# Altium PCB 388D_Control_v1_PCB1_harry.PcbDoc (part 4 of 5)
Units mil, origin at the board's own origin, x right, y up, seen from the top; angles counter-clockwise.
Board outline 4800 x 4000 mil, 6 copper layers (Top Layer, Singal Layer 2, Signal layer 3, Signal Layer 4, Signal Layer 5, Bottom Layer), stack 32.7 mil thick; 431 components, 469 nets, 2000 pads, 719 vias.
Unrouted connection lines stored in the file: 971.
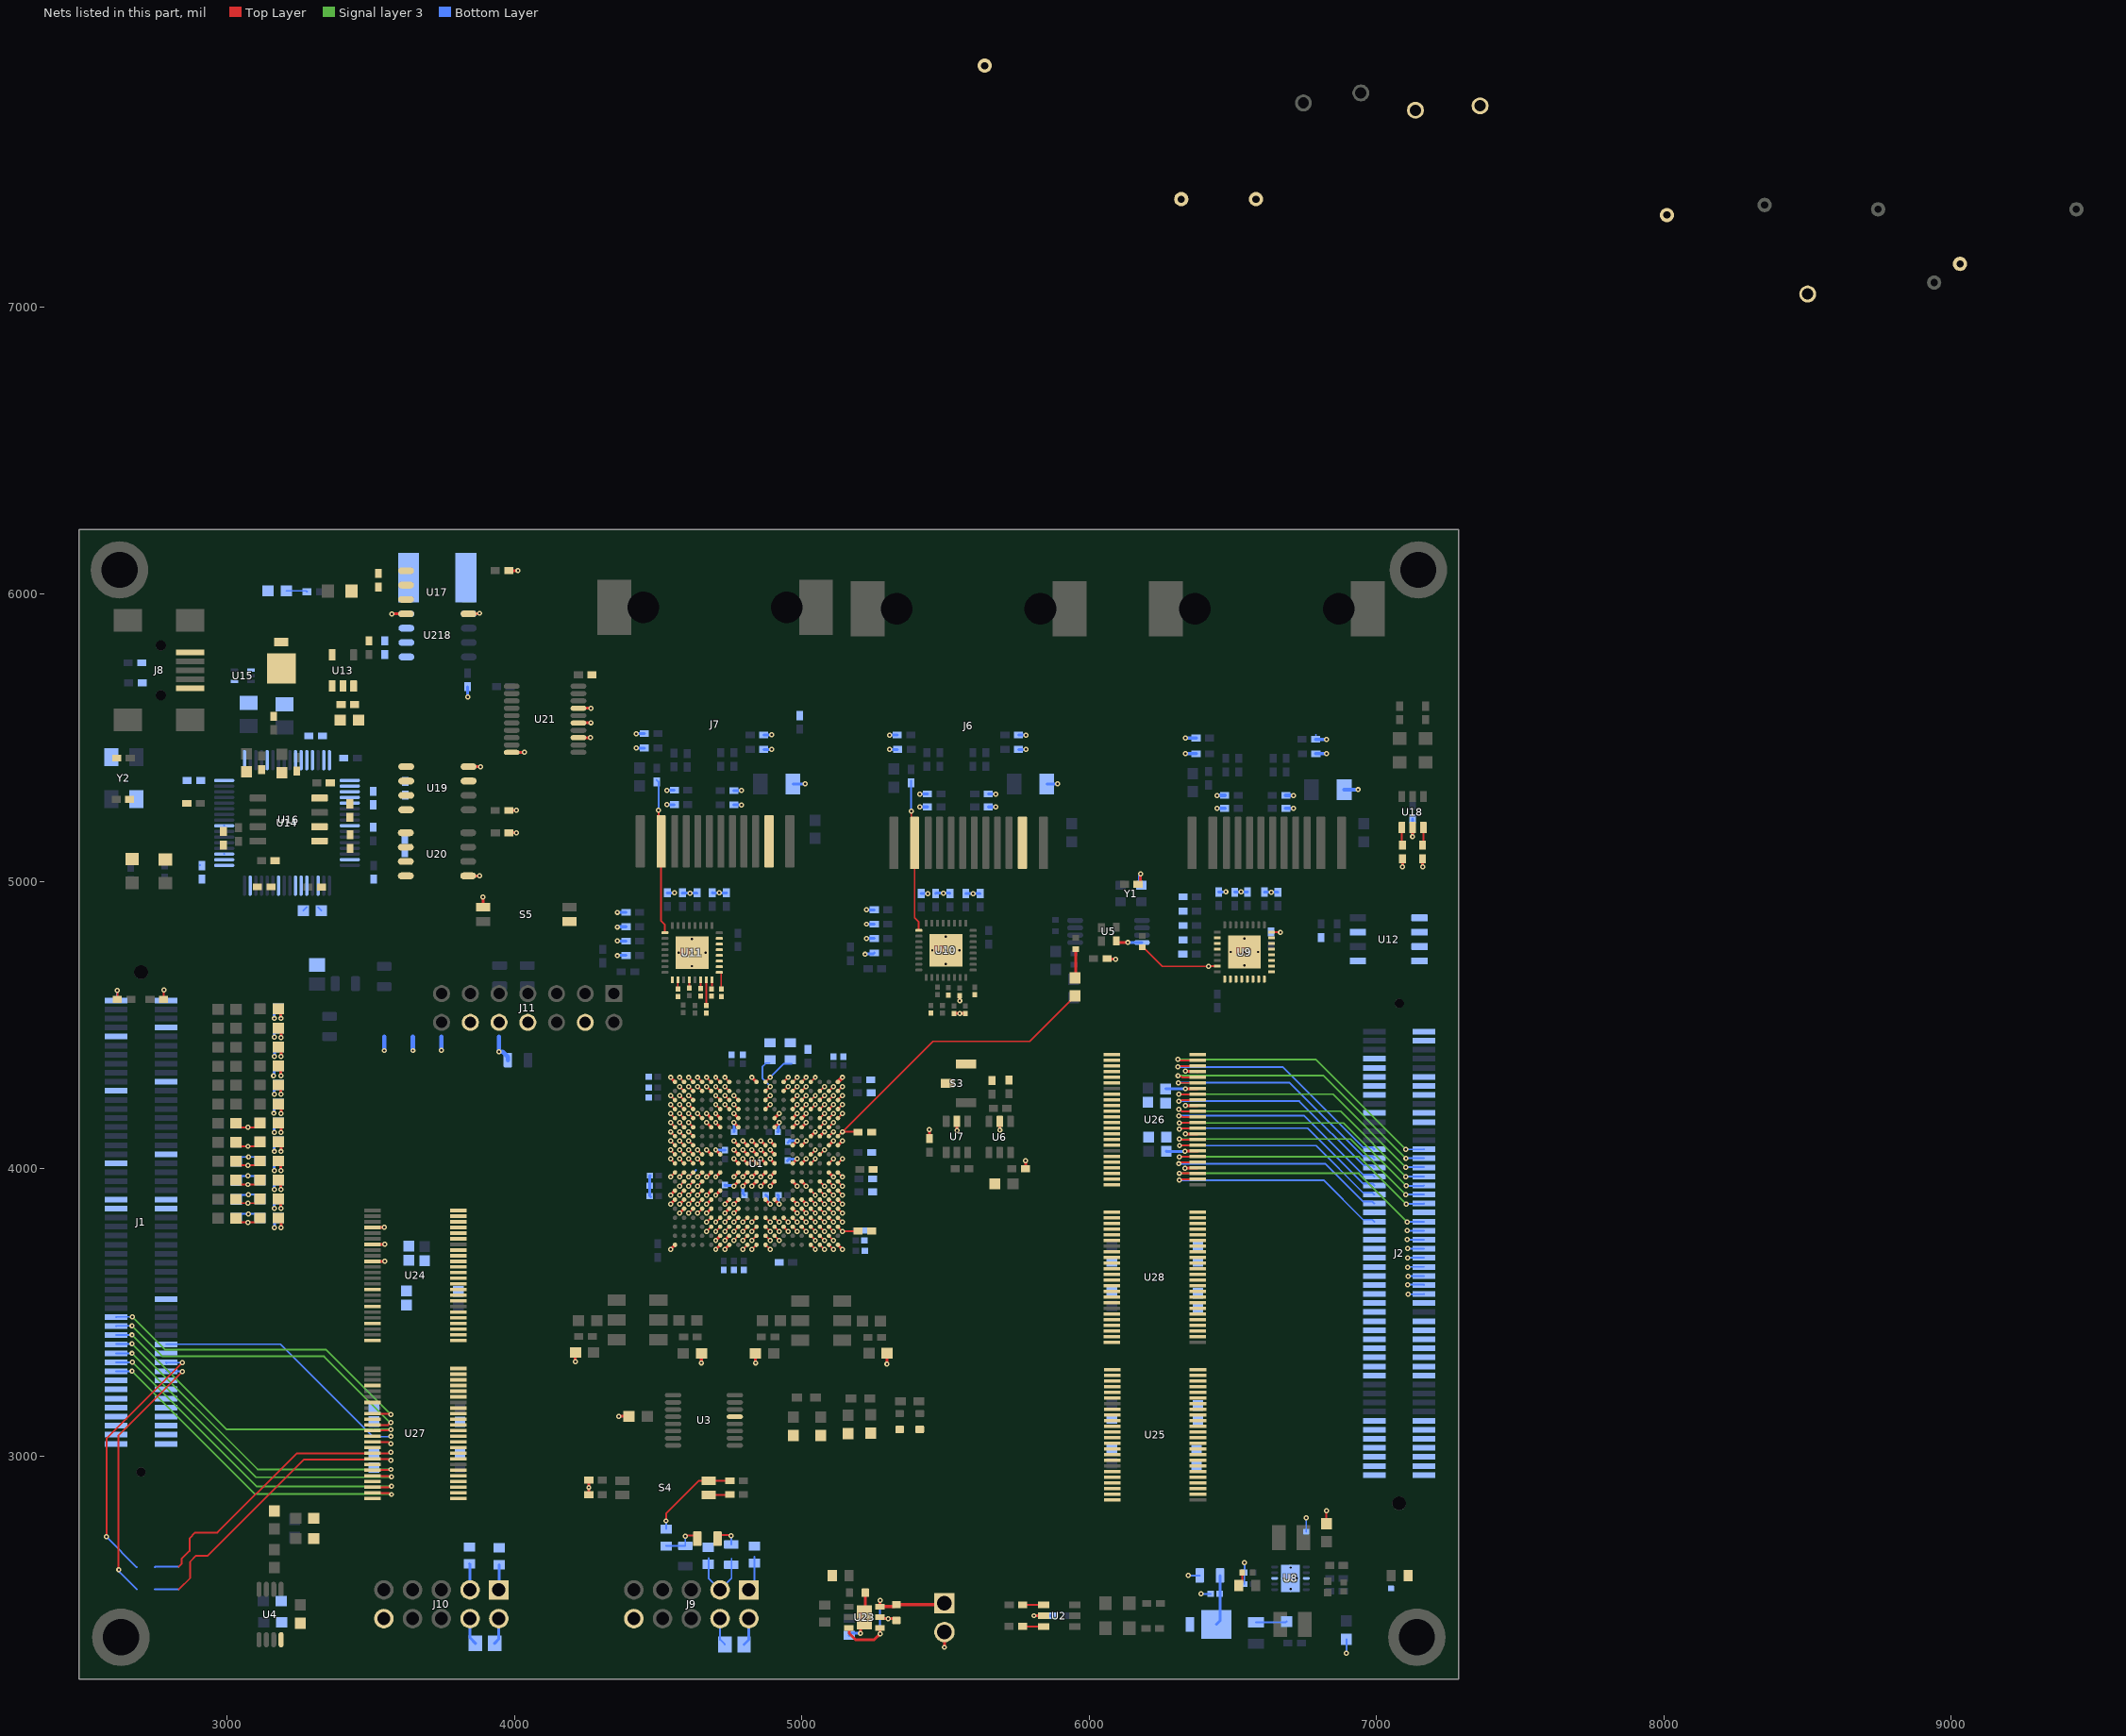
[diagram p4: the nets of this part, all layers, seen from the top]

## Via types
v1: diameter 18, hole 8, Top Layer to Bottom Layer, tented both sides, 703 vias
v2: diameter 19.68, hole 7.87, Top Layer to Bottom Layer, tented both sides, 15 vias
v3: diameter 18/18/18/18/18/18 (per signal layer), hole 8, Top Layer to Bottom Layer, tented both sides, 1 vias

## Nets (pads, with @x,y where several pads share a name; then routed paths per layer and width w, separated by ;. In a path a pad name is that pad's centre, name@x,y a point inside that pad or via, vN(x,y) a via of type N, cw(c..) or ccw(c..) an arc to the next point about the centre after c; other vN are vias at no path point) (continued)
bMCU_GPIO21: J1.72 U27.9 | length 1163.1
  Top Layer w6.25: U27.9@3505.87,3147.9 3561.92,3147.9 3562.57,3147.25 3567.75,3147.25 v1(3570,3145)
  Signal layer 3 w6.25: v1(2670,3485) 2784,3371 3344,3371 v1(3570,3145)
  Bottom Layer w6.25: J1.72@2613.39,3484.29 2614.09,3485 v1(2670,3485)
bMCU_GPIO22: J1.74 U27.11 | length 1164.3
  Top Layer w6.25: U27.11@3505.87,3108.53 3560.46,3108.53 3569.94,3118 v1(3570,3118)
  Signal layer 3 w6.25: v1(2669,3454) 2775,3348 3337,3348 3567,3118 v1(3570,3118)
  Bottom Layer w6.25: J1.74@2613.39,3452.8 2614.59,3454 v1(2669,3454)
bMCU_GPIO23: J1.76 U27.12 | length 1159.6
  Top Layer w6.25: U27.12@3505.87,3088.84 3508.65,3091.62 3509.35,3090.92 3567.92,3090.92 v1(3570,3093)
  Signal layer 3 w6.25: v1(2669,3422) 2997,3094 3569,3094 v1(3570,3093)
  Bottom Layer w6.25: J1.76@2613.39,3421.3 2614.09,3422 v1(2669,3422)
bMCU_GPIO24: J1.77 U27.13 | length 917.1
  Bottom Layer w6.25: J1.77@2786.61,3389.8 3185.22,3389.8 3507.02,3068 3569,3068 v1(3570,3069)
bMCU_GPIO25: J1.79 U27.14 | length 66.4
  Top Layer w6.25: U27.14@3505.87,3049.47 3561.35,3049.47 3566.82,3044 v1(3570,3044)
bMCU_GPIO26: J1.81 U27.16 | length 1949
  Top Layer w6.25: v1(2579,2720) 2580,2721 2580,3062 v1(2844,3326) ; 2832,2616 2841.28,2625.28 2841.28,2642.28 2869,2670 2869,2714 2889,2734 2966,2734 3242.1,3010.1 3562.92,3010.1 3566.82,3014 v1(3570,3014)
  Bottom Layer w6.25: v1(2579,2720) 2579,2719.52 2684.52,2614 2685.5,2614 ; 2748.5,2614 2750.5,2616 2832,2616 ; J1.81@2786.61,3326.81 2786.61,3326.39 2789,3324 2791,3326 v1(2844,3326)
bMCU_GPIO27: J1.83 U27.17 | length 1978.7
  Top Layer w6.25: v1(2623,2605) 2622,2606 2622,3073 v1(2844,3295) ; 2832,2537.26 2871,2576.26 2871,2633 2892,2654 2932,2654 3266,2988 3503.45,2988 U27.17@3505.87,2990.42 3562.4,2990.42 3566.82,2986 v1(3570,2986)
  Bottom Layer w6.25: v1(2623,2605) 2625.25,2602.75 2625.25,2596.27 2684.52,2537 2685.5,2537 ; 2748.5,2537 2748.76,2537.26 2832,2537.26 ; J1.83@2786.61,3295.32 2843.68,3295.32 v1(2844,3295)
bMCU_GPIO28: J1.78 U27.19 | length 1201.5
  Top Layer w6.25: U27.19@3505.87,2951.05 3507.34,2952.52 3567.52,2952.52 v1(3569,2954)
  Signal layer 3 w6.25: v1(2669,3391) 3106,2954 v1(3569,2954)
  Bottom Layer w6.25: J1.78@2613.39,3389.8 2614.58,3391 v1(2669,3391)
bMCU_GPIO29: J1.80 U27.20 | length 1205.2
  Top Layer w6.25: U27.20@3505.87,2931.36 3561.46,2931.36 3562.57,2930.25 3569.75,2930.25 v1(3572,2928)
  Signal layer 3 w6.25: v1(2669,3358) 3100,2927 3571,2927 v1(3572,2928)
  Bottom Layer w6.25: J1.80@2613.39,3358.31 2613.69,3358 v1(2669,3358)
bMCU_GPIO30: J1.82 U27.22 | length 1205.8
  Top Layer w6.25: U27.22@3505.87,2891.99 3561.81,2891.99 3563.57,2893.75 3569.75,2893.75 v1(3572,2896)
  Signal layer 3 w6.25: v1(2670,3327) 3102,2895 3571,2895 v1(3572,2896)
  Bottom Layer w6.25: J1.82@2613.39,3326.81 2613.57,3327 v1(2670,3327)
bMCU_GPIO31: J1.84 U27.23 | length 1204.9
  Top Layer w6.25: U27.23@3505.87,2872.31 3563.51,2872.31 3568.82,2867 v1(3572,2867)
  Signal layer 3 w6.25: v1(2669,3296) 3097,2868 3571,2868 v1(3572,2867)
  Bottom Layer w6.25: J1.84@2613.39,3295.32 2614.07,3296 v1(2669,3296)
bMCU_GPIO35: J2.23 U25.2
bMCU_GPIO36: J2.24 U25.3
bMCU_GPIO37: J2.25 U25.5
bMCU_GPIO38: J2.26 U25.6
bMCU_GPIO60: J2.27 U25.8
bMCU_GPIO61: J2.28 U25.9
bMCU_GPIO62: J2.29 U25.11
bMCU_GPIO63: J2.30 U25.12
bMCU_GPIO64: J2.31 U25.13
bMCU_GPIO65: J2.32 U25.14
bMCU_GPIO66: J2.33 U25.16
bMCU_GPIO67: J2.34 U25.17
bMCU_GPIO68: J2.35 U25.19
bMCU_GPIO69: J2.36 U25.20
bMCU_GPIO70: J2.39 U25.22
bMCU_GPIO71: J2.40 U25.23
bMCU_GPIO72: J2.41 U28.2
bMCU_GPIO73: J2.42 U28.3 | length 56.3
  Bottom Layer w6.25: v1(7109,3564) 7164.39,3564 J2.42@7165,3564.61
bMCU_GPIO74: J2.43 U28.5
bMCU_GPIO76: J2.45 U28.8
bMCU_GPIO77: J2.46 U28.9 | length 56.2
  Bottom Layer w6.25: v1(7109,3627) 7164.4,3627 J2.46@7165,3627.6
bMCU_GPIO78: J2.47 U28.11
bMCU_GPIO79: J2.48 U28.12 | length 57.9
  Bottom Layer w6.25: v1(7108,3657) 7110.1,3659.1 J2.48@7165,3659.1
bMCU_GPIO80: J2.49 U28.13
bMCU_GPIO81: J2.50 U28.14 | length 57.2
  Bottom Layer w6.25: v1(7108,3691) 7164.59,3691 J2.50@7165,3690.59
bMCU_GPIO82: J2.51 U28.16
bMCU_GPIO83: J2.52 U28.17 | length 57.4
  Bottom Layer w6.25: v1(7108,3723) 7108.91,3722.09 J2.52@7165,3722.09
bMCU_GPIO84: J2.53 U28.19
bMCU_GPIO85: J2.54 U28.20 | length 59.2
  Bottom Layer w6.25: v1(7106,3754) 7106.42,3753.58 J2.54@7165,3753.58
bMCU_GPIO86: J2.55 U28.22
bMCU_GPIO87: J2.56 U28.23 | length 59.4
  Bottom Layer w6.25: v1@7106,3786 v1(7106.92,3785.08) J2.56@7165,3785.08
bMCU_GPIO88: J2.57 U26.2 | length 804.1
  Top Layer w6.25: v1(6313,3961) 6315.25,3963.25 6322.43,3963.25 6323.49,3964.31 U26.2@6377.13,3964.31
  Bottom Layer w6.25: v1(6313,3961) 6815,3961 6952.71,3823.29 6985.05,3823.29 J2.57@6991.77,3816.58
bMCU_GPIO89: J2.58 U26.3 | length 988.1
  Top Layer w6.25: v1(6313,3985) 6313.5,3984.5 6376.63,3984.5 U26.3@6377.13,3983.99
  Signal layer 3 w6.25: v1(6313,3985) 6937.58,3985 v1(7106.79,3815.79)
  Bottom Layer w6.25: v1@7106,3815 7107.58,3816.58 J2.58@7165,3816.58
bMCU_GPIO90: J2.61 U26.5 | length 804.5
  Top Layer w6.25: v1(6312,4018) 6315.18,4018 6320.54,4023.36 U26.5@6377.13,4023.36
  Bottom Layer w6.25: v1(6312,4018) 6821,4018 6952.71,3886.29 6985.05,3886.29 J2.61@6991.77,3879.57
bMCU_GPIO91: J2.62 U26.6 | length 985.1
  Top Layer w6.25: v1(6313,4042) 6313.52,4042.52 6376.61,4042.52 U26.6@6377.13,4043.05
  Signal layer 3 w6.25: v1(6313,4042) 6939,4042 v1(7103,3878)
  Bottom Layer w6.25: v1(7103,3878) 7163.43,3878 J2.62@7165,3879.57
bMCU_GPIO92: J2.63 U26.8 | length 811.9
  Top Layer w6.25: v1(6314,4081) 6315.42,4082.42 U26.8@6377.13,4082.42
  Bottom Layer w6.25: v1(6314,4081) 6789,4081 6952.22,3917.78 6985.05,3917.78 J2.63@6991.77,3911.06
bMCU_GPIO93: J2.64 U26.9 | length 996.9
  Top Layer w6.25: v1(6313,4104) 6314.9,4102.1 U26.9@6377.13,4102.1
  Signal layer 3 w6.25: v1(6313,4104) 6909,4104 v1(7102,3911)
  Bottom Layer w6.25: v1(7102,3911) 7102.06,3911.06 J2.64@7165,3911.06
bMCU_GPIO94: J2.65 U26.11 | length 828.6
  Top Layer w6.25: v1(6313,4138) 6315.25,4140.25 6321.43,4140.25 6322.65,4141.47 U26.11@6377.13,4141.47
  Bottom Layer w6.25: v1(6313,4138) 6315.25,4140.25 6321.43,4140.25 6323.18,4142 6759,4142 6951.72,3949.28 6985.05,3949.28 J2.65@6991.77,3942.56
bMCU_GPIO95: J2.70 U26.17 | length 1025.7
  Top Layer w6.25: v1(6311,4260) 6311.21,4259.79 6376.93,4259.79 U26.17@6377.13,4259.58
  Signal layer 3 w6.25: v1(6311,4260) 6848,4260 v1(7102,4006)
  Bottom Layer w6.25: v1(7102,4006) 7164.55,4006 J2.70@7165,4005.55
bMCU_GPIO101: J2.71 U26.19 | length 858.3
  Top Layer w6.25: v1(6310,4300) 6310.52,4299.48 6376.61,4299.48 U26.19@6377.13,4298.95
  Bottom Layer w6.25: v1(6310,4300) 6697,4300 6953.23,4043.77 6985.05,4043.77 J2.71@6991.77,4037.05
bMCU_GPIO102: J2.72 U26.20 | length 1046
  Top Layer w6.25: v1(6309,4324) 6311.25,4321.75 6320.43,4321.75 6323.54,4318.64 U26.20@6377.13,4318.64
  Signal layer 3 w6.25: v1(6309,4324) 6310,4325 6814.1,4325 v1(7102.05,4037.05)
  Bottom Layer w6.25: v1(7102.05,4037.05) J2.72@7165,4037.05
bMCU_GPIO103: J2.73 U26.22 | length 872.8
  Top Layer w6.25: v1(6308,4355) 6311.18,4355 6314.19,4358.01 U26.22@6377.13,4358.01
  Bottom Layer w6.25: v1(6308,4355) 6673,4355 6952.74,4075.26 6985.05,4075.26 J2.73@6991.77,4068.54
bMCU_GPIO104: J2.74 U26.23 | length 1057.4
  Top Layer w6.25: v1(6308,4381) 6311.18,4381 6314.49,4377.69 U26.23@6377.13,4377.69
  Signal layer 3 w6.25: v1(6308,4381) 6788,4381 v1(7101,4068)
  Bottom Layer w6.25: v1(7101,4068) 7164.46,4068 J2.74@7165,4068.54
bMCU_GPIO126: J2.44 U28.6 | length 57.4
  Bottom Layer w6.25: v1(7108,3597) 7164.1,3597 J2.44@7165,3596.1
bMCU_GPIO127: J2.67 U26.13 | length 834.8
  Top Layer w6.25: v1(6312,4185) 6314.25,4182.75 6322.43,4182.75 6324.34,4180.84 U26.13@6377.13,4180.84
  Bottom Layer w6.25: v1(6312,4185) 6313,4186 6747,4186 6952.23,3980.77 6985.05,3980.77 J2.67@6991.77,3974.06
bMCU_GPIO128: J2.68 U26.14 | length 1021
  Top Layer w6.25: v1(6311,4208) 6314.18,4208 6321.65,4200.53 U26.14@6377.13,4200.53
  Signal layer 3 w6.25: v1(6311,4208) 6314.18,4208 6321.18,4201 6874,4201 v1(7102,3973)
  Bottom Layer w6.25: v1(7102,3973) 7163.94,3973 J2.68@7165,3974.06
bMCU_GPIO133: J2.66 U26.12 | length 1008
  Top Layer w6.25: v1(6313,4160) 6313.58,4160.58 6376.56,4160.58 U26.12@6377.13,4161.16
  Signal layer 3 w6.25: v1(6313,4160) 6313.08,4160.08 6883.92,4160.08 v1(7103,3941)
  Bottom Layer w6.25: v1(7103,3941) 7163.44,3941 J2.66@7165,3942.56
bMCU_GPIO147: J2.69 U26.16 | length 842
  Top Layer w6.25: v1(6312,4236) 6314.25,4238.25 6320.43,4238.25 6322.08,4239.9 U26.16@6377.13,4239.9
  Bottom Layer w6.25: v1(6312,4236) 6731,4236 6954.73,4012.27 6985.05,4012.27 J2.69@6991.77,4005.55
BOOT_1: R158.1 R162.2 R167.2 | length 144.1
  Top Layer w6.25: v1@4597.19,2724 4624.57,2724 R158.1@4635.57,2713
  Bottom Layer w6.25: R167.2@4527,2687.47 4527.57,2688.04 R162.2@4594,2688.04 v1(4594,2722)
BOOT_2/CM_TX: J2.100 R168.2
C2C3_N: C8.1 R27.1 U1.P3 | length 110.1
  Top Layer w6.25: v1(4605.55,3877.52) U1.P3@4621.3,3893.27
  Bottom Layer w6.25: R27.1@3045.54,3961.06 3045.54,3972.58 3048.6,3975.64 3072.48,3975.64 v1(3072.54,3975.7) 3100.51,3975.7 C8.1@3114.7,3961.51
C2C3_P: C20.1 R26.1 U1.R3 | length 98.5
  Top Layer w6.25: v1(4605.55,3846.02) U1.R3@4621.3,3861.77
  Bottom Layer w6.25: R26.1@3045.54,4038.76 3048.48,4041.7 3100.64,4041.7 C20.1@3114.7,4027.64
  other v1: 3074.54,4041.7
C4C5_N: C9.1 R29.1 U1.P4 | length 110.4
  Top Layer w6.25: v1(4637.05,3877.52) U1.P4@4652.8,3893.27
  Bottom Layer w6.25: R29.1@3045.54,3828.7 3045.54,3840.22 3048.6,3843.27 3073.12,3843.27 v1(3073.54,3843.7) 3100.24,3843.7 C9.1@3114.7,3829.24
C4C5_P: C21.1 R28.1 U1.R4 | length 111.1
  Top Layer w6.25: v1(4637.05,3846.02) U1.R4@4652.8,3861.77
  Bottom Layer w6.25: R28.1@3045.54,3894.88 3045.54,3906.4 3048.6,3909.46 3072.3,3909.46 v1(3073.54,3910.7) 3099.38,3910.7 C21.1@3114.7,3895.38
CM_RX: J2.98 R169.2
CPU1_RX: J9.1 R165.2 | length 123.8
  Bottom Layer w6.25: J9.1@4815,2535 4835,2555 4835,2650.47
CPU1_TX: J9.3 R159.1 R166.2 | length 253.6
  Bottom Layer w6.25: 4675,2645.94 4675,2575 J9.3@4715,2535 4755,2575 4755,2644.57
CPU2_RX: J10.1 R164.2 | length 87.9
  Bottom Layer w10: J10.1@3945,2535 3946,2536 R164.2@3946,2622.47
CPU2_TX: J10.3 R163.2 | length 91.3
  Bottom Layer w10: R163.2@3843,2625.47 3845,2623.47 J10.3@3845,2535
D0D1_N: C10.1 R32.1 U1.U5 | length 118.2
  Top Layer w6.25: R32.1@3030.99,4093.06 3045.35,4078.7 3099.63,4078.7 C10.1@3114.7,4093.77 ; v1(4668.54,3783.03) U1.U5@4684.29,3798.78
  other v1: 3072.49,4078.7
D0D1_P: C22.1 R31.1 U1.T5 | length 118.3
  Top Layer w6.25: R31.1@3030.99,4159.15 3045.45,4144.7 3099.5,4144.7 C22.1@3114.7,4159.9 ; v1(4668.54,3814.53) U1.T5@4684.29,3830.28
  other v1: 3072.47,4144.7
D2D3_N: C11.1 R34.1 U1.U6 | length 118.8
  Top Layer w6.25: R34.1@3030.99,3960.88 3046.17,3945.7 3097.91,3945.7 3113.72,3961.51 C11.1@3114.7,3961.51 ; v1(4700.04,3783.03) U1.U6@4715.79,3798.78
  other v1: 3072.04,3945.7
D2D3_P: C23.1 R33.1 U1.T6 | length 118.1
  Top Layer w6.25: R33.1@3030.99,4026.97 3045.26,4012.7 3099.76,4012.7 C23.1@3114.7,4027.64 ; v1(4700.04,3814.53) U1.T6@4715.79,3830.28
  other v1: 3072.51,4012.7
D4D5_N: C12.1 R36.1 U1.U7 | length 118.6
  Top Layer w6.25: R36.1@3030.99,3828.7 3045.99,3813.7 3099.16,3813.7 C12.1@3114.7,3829.24 ; v1(4731.54,3783.03) U1.U7@4747.28,3798.78
  other v1: 3072.57,3813.7
D4D5_P: C24.1 R35.1 U1.T7 | length 117.9
  Top Layer w6.25: R35.1@3030.99,3894.79 3045.08,3880.7 3100.02,3880.7 C24.1@3114.7,3895.38 ; v1(4731.54,3814.53) U1.T7@4747.28,3830.28
  other v1: 3072.55,3880.7
EMU0: J1.2 R177.2 | length 69.2
  Top Layer w6.25: v1(2617,4622) 2617.76,4621.24 R177.2@2617.76,4590
  Bottom Layer w6.25: J1.2@2613.39,4586.65 2617,4590.27 v1(2617,4622)
EMU1: J1.1 R176.1 | length 33.6
  Top Layer w6.25: R176.1@2778.62,4590 2778.62,4621.62 v1(2780,4623)
EMU_1V8: C136.2 C137.2 C138.2 C139.2 U14.12 U14.37 U14.49 U14.64 | length 17.6
  Bottom Layer w6.25: C137.2@2905.62,5057 C137.2@2905.76,5056.87 ; C136.2@3264.5,4899 C136.2@3276.8,4911.29
EMU_3V3: C133.1 C140.2 C141.2 C142.2 C143.2 C151.2 C154.2 C156.2 C158.2 L6.2 L7.2 R142.1 R143.2 R145.2 R149.1 R151.1 TP12.1 U13.5 U14.20 U14.31 U14.42 U14.50 U14.56 U16.6 U16.8 U17.1 U19.8 U20.1 U218.1 | length 74
  Bottom Layer w6.25: U14.56@2989.06,5194.33 U14.56@2989.39,5194.66 ; C133.1@3205.5,6012 3274.76,6012 R142.1@3277.76,6009
EMU_5V0: C132.2 C134.1 D7.1 D9.2 D10.2 TP11.1 U13.1 U13.3 U15.1
EMU_GND: C132.1 C133.2 C134.2 C135.1 C136.1 C137.1 C138.1 C139.1 C140.1 C141.1 C142.1 C143.1 C144.2 C145.1 C146.2 C147.1 C148.1 C149.1 C150.1 C151.1 C154.1 C156.1 C158.1 C160.2 D8.1 J8.5 R146.2 R152.2 R153.1 R154.1 R155.1 TP13.1 U13.2 U14.1 U14.5 U14.10 U14.11 U14.13 U14.15 U14.25 U14.35 U14.47 U14.51 U15.4 U16.5 U17.4 U19.5 U20.3 U20.4 U218.4 Y2.2 Y2.4 | length 116.2
  Top Layer w10: v1(3573,5932) U17.4@3622.5,5932
  Bottom Layer w6.25: U14.51@2989.28,5096.12 U14.51@2989.39,5096.24 ; C136.1@3316.17,4910.33 C136.1@3327.5,4899
  Bottom Layer w10: v1(3573,5932) U218.4@3623.5,5932
EMU_SCI-RX: U14.38 U20.2
EMU_SCI-TX: U14.39 U19.6
EMU_TCK: R144.1 U14.16 U218.2
EMU_TDI: U14.17 U17.2
EMU_TDO: U14.18 U19.7
EMU_TMS: R143.1 U14.19 U218.3
EMU_TRSTn: U14.21 U17.3
EMU_USB_5V0: D7.2 J8.1
ENET_PHY_CLK: R77.2 U9.23 | length 289.7
  Top Layer w6.25: R77.2@6184,4772.31 6185.97,4772.31 6253.28,4705 v1(6415,4705) 6415.39,4705.39 6445.12,4705.39 U9.23@6445.51,4705.79
ERRORSTS: J2.80 R64.2 TP5.1 U1.U19 | length 77.1
  Top Layer w6.25: U1.U19@5125.24,3798.78 v1(5140.98,3783.03) 5194.41,3783.03 R64.2@5195.38,3784
EZ_3V3: C163.1 C164.1 J9.4 J10.4 R157.2 R158.2 R159.2 TP14.1 | length 276.8
  Top Layer w6.25: R158.2@4706.04,2713 4706.04,2714.21 4717.83,2726 v1@4755.23,2726
  Bottom Layer w6.25: J9.4@4715,2435 4715,2361.54 C163.1@4731.54,2345 ; R159.2@4754,2693.04 v1(4754,2724)
  Bottom Layer w10: J10.4@3845,2435 3845,2367.54 C164.1@3863.54,2349
EZ_5V0: C162.1 J4.1 U23.1 U23.3 U23.6 | length 531.6
  Top Layer w6.25: J4.1@5491.56,2483.56 J4.1@5496,2488
  Top Layer w10: U23.6@5163,2402.2 5164.79,2400.41 5164.79,2383.21 5186,2362 5252,2362 v1(5272.06,2382.06) U23.1@5272.06,2402.2 ; v1(5272.06,2498.94) U23.3@5272.06,2477 5322.44,2477 C162.1@5329,2483.56 J4.1@5491.56,2483.56
  Bottom Layer w6.25: v1(5272.06,2382.06) v1(5272.06,2498.94)
F2838x_25MHZ_CLK: R83.2 R85.2 | length 98.8
  Top Layer w10: R85.2@5953,4665.5 R83.2@5953,4764.31
F2838x_CLK: R63.2 R85.1 TP10.1 U1.G19 | length 1082.8
  Top Layer w6.25: U1.G19@5125.24,4113.74 v1(5140.98,4129.49) ; R63.2@5195.38,4128 5193.89,4129.49 v1(5140.98,4129.49) ; R85.1@5950,4602.5 5950,4601.52 5792.48,4444 5455.5,4444 v1(5140.98,4129.49)
GND: C1.2 C2.2 C3.2 C4.2 C5.2 C6.2 C7.2 C8.2 C9.2 C10.2 C11.2 C12.2 C13.2 C14.2 C15.2 C16.2 C17.2 C18.2 C19.2 C20.2 C21.2 C22.2 C23.2 C24.2 C25.1 C26.2 C27.2 C28.2 C29.2 C30.2 C31.2 C32.2 C33.2 C34.2 C35.2 C37.2 C38.1 C39.1 C40.1 C41.1 C42.2 C43.2 C44.1 C45.1 C46.1 C47.1 C48.1 C49.1 C50.1 C51.1 C52.1 C53.2 C54.2 C55.1 C56.1 C57.1 C58.1 C59.1 C60.1 C61.1 C62.1 C63.1 C64.1 C65.1 C66.1 C67.1 C68.1 C69.1 C70.1 C71.1 C72.1 C73.2 C74.2 C75.2 C76.2 C77.2 C78.2 C79.2 C80.2 C81.2 C82.2 C83.2 C84.2 C85.2 C86.2 C87.2 C88.2 C89.1 C90.1 C91.1 C92.1 C93.2 C94.2 C95.1 C96.2 C97.2 C98.2 C99.2 C100.2 C101.2 C102.2 C103.2 C104.2 C105.2 C106.1 C107.1 C108.2 C109.1 C110.1 C111.2 C112.2 C113.1 C114.2 C115.2 C116.2 C117.2 C118.2 C119.2 C120.2 C121.2 C122.2 C123.2 C124.1 C125.1 C126.2 C127.1 C128.1 C129.2 C130.2 C131.1 C152.2 C153.1 C155.2 C157.2 C159.2 C160.1 C161.2 C162.2 C163.2 C164.2 C165.2 C166.2 C167.2 C168.2 C169.2 C170.2 C171.2 C172.2 C173.2 C174.2 C175.2 C176.2 C177.2 C178.2 C179.2 C180.2 C181.2 C182.2 C183.2 C184.2 C185.2 J1.7 J1.10 J1.19 J1.22 J1.35 J1.38 J1.46 J1.47 J1.67 J1.85 J1.99 J2.13 J2.37 J2.59 J2.81 J4.2 J9.2 J9.10 J10.2 J10.10 J11.4 J11.8 J11.10 J11.12 LED1.1 R52.1 R53.1 R54.1 R55.1 R62.1 R63.1 R64.1 R79.2 R80.1 R82.2 R86.2 R89.2 R104.2 R111.1 R112.1 R113.1 R114.1 R115.1 R116.1 R123.2 R124.2 R128.2 R135.1 R136.1 R137.1 R138.1 R139.1 R161.2 R175.1 S3.2 S3.3 S5.1 TP4.1 U1.A1 U1.A10 U1.A19 U1.E5 U1.E6 U1.E8 U1.E12 U1.E14 U1.E15 U1.F5 U1.F6 U1.F8 U1.F12 U1.F14 U1.F15 U1.G16 U1.G17 U1.H8 U1.H9 U1.H10 U1.H11 U1.H12 U1.H14 U1.H15 U1.H18 U1.H19 U1.J5 U1.J6 U1.J8 U1.J9 U1.J10 U1.J11 U1.J12 U1.K8 U1.K9 U1.K10 U1.K11 U1.K12 U1.K14 U1.K15 U1.L5 U1.L6 U1.L8 U1.L9 U1.L10 U1.L11 U1.L12 U1.L18 U1.M8 U1.M9 U1.M10 U1.M11 U1.M12 U1.M14 U1.M15 U1.N1 U1.N5 U1.N6 U1.P1 U1.P2 U1.P5 U1.P7 U1.P8 U1.P11 U1.P12 U1.P14 U1.P15 U1.R2 U1.R5 U1.R7 U1.R8 U1.R14 U1.R15 U1.V6 U1.V7 U1.W1 U1.W6 U1.W7 U1.W19 U2.2 U3.13 U4.4 U5.4 U6.2 U7.2 U8.8 U8.11 U9.33@6540,4755 U10.33@5501.06,4761.06 U11.33@4617.76,4753 U12.1 U12.2 U12.3 U12.4 U12.7 U17.5 U18.2 U19.4 U20.5 U21.10 U21.13 U21.15 U21.17 U23.2 U23.7 U24.4 U24.10 U24.15 U24.21 U24.24 U24.25 U24.28 U24.34 U24.39 U24.45 U25.4 U25.10 U25.15 U25.21 U25.24 U25.25 U25.28 U25.34 U25.39 U25.45 U26.4 U26.10 U26.15 U26.21 U26.24 U26.25 U26.28 U26.34 U26.39 U26.45 U27.4 U27.10 U27.15 U27.21 U27.24 U27.25 U27.28 U27.34 U27.39 U27.45 U28.4 U28.10 U28.15 U28.21 U28.24 U28.25 U28.28 U28.34 U28.39 U28.45 U218.5 Y1.2 | length 7203.3
  Top Layer w6.25: C37.2@6825,2765 v1(6825,2810)
  Top Layer w10: C12.2@3177.69,3829.24 3187.54,3819.39 v1(3187.54,3795.7) ; C24.2@3177.69,3895.38 3186.54,3886.53 v1(3186.54,3862.7) ; C11.2@3177.69,3961.51 3186.54,3952.66 v1(3186.54,3928.7) ; C23.2@3177.69,4027.64 3186.54,4018.79 v1(3186.54,3994.7) ; C10.2@3177.69,4093.77 3187.54,4083.92 v1(3187.54,4060.7) ; C22.2@3177.69,4159.9 3187.54,4150.05 v1(3187.54,4126.7) ; C7.2@3177.69,4226.04 3187.54,4216.19 v1(3187.54,4192.7) ; C19.2@3177.69,4292.17 3186.54,4283.32 v1(3186.54,4259.7) ; C6.2@3177.69,4358.3 3186.54,4349.45 v1(3186.54,4324.7) ; C18.2@3177.69,4424.43 3187.54,4414.58 v1(3187.54,4391.7) ; C5.2@3177.69,4490.56 3187.54,4480.71 v1(3187.54,4457.7) ; C17.2@3177.69,4556.7 3186.54,4547.85 v1(3186.54,4523.7) ; U24.10@3505.87,3678.21 3506.26,3678.61 3547.61,3678.61 v1(3548,3679) ; U24.4@3505.87,3796.32 3506.2,3796.66 3545.66,3796.66 v1(3546,3797) ; U20.5@3838.5,5020 v1(3879,5020) ; U17.5@3839.5,5932 3840.5,5933 3878,5933 v1(3879,5934) ; U19.4@3840,5400 v1(3882,5400) ; v1(3890,4947) 3890,4912 S5.1@3891,4911 ; C157.2@3979.62,5248 v1(4006,5248) ; C152.2@3979.62,6082.38 v1(4012,6082.38) ; C159.2@3980.62,5170 v1(4007,5170) ; U21.10@3989.86,5449.84 v1(4033.84,5449.84) v1@4034,5450 ; v1(4211,3329) 4211,3359.5 C26.2@4212.5,3361 ; U21.13@4222.15,5501.01 v1(4264,5501) ; U21.15@4222.14,5552.2 4222.54,5552.6 4265.6,5552.6 v1(4266,5553) ; U21.17@4222.14,5603.39 4265.61,5603.39 v1(4266,5603) ; R80.1@4258.38,2866 v1(4258.38,2891.5) R79.2@4258.38,2917 ; v1(4363,3139) C25.1@4398.5,3139 ; v1(4542.56,3720.04) U1.W1@4558.31,3735.79 ; v1(4542.56,3877.52) U1.P1@4558.31,3893.27 ; v1(4542.56,3909.02) U1.N1@4558.31,3924.76 ; v1(4542.56,4318.46) U1.A1@4558.31,4302.72 ; v1(4574.06,3846.02) U1.R2@4589.8,3861.77 ; v1(4574.06,3877.52) U1.P2@4589.8,3893.27 ; v1(4650,3325) 4650,3357.5 C27.2@4650.5,3358 ; v1(4668.54,3846.02) U1.R5@4684.29,3861.77 ; v1(4668.54,3877.52) U1.P5@4684.29,3893.27 ; v1(4668.54,3909.02) U1.N5@4684.29,3924.76 ; v1(4668.54,3972.01) U1.L5@4684.29,3987.76 ; v1(4668.54,4066.5) U1.J5@4684.29,4050.75 ; v1(4668.54,4160.98) U1.F5@4684.29,4145.24 ; v1(4668.54,4192.48) U1.E5@4684.29,4176.73 ; v1(4700.04,3720.04) U1.W6@4715.79,3735.79 ; v1(4700.04,3751.54) U1.V6@4715.79,3767.28 ; v1(4700.04,3909.02) U1.N6@4715.79,3924.76 ; v1(4700.04,3972.01) U1.L6@4715.79,3987.76 ; v1(4700.04,4066.5) U1.J6@4715.79,4050.75 ; v1(4700.04,4160.98) U1.F6@4715.79,4145.24 ; v1(4700.04,4192.48) U1.E6@4715.79,4176.73 ; v1(4731.54,3720.04) U1.W7@4747.28,3735.79 ; v1(4731.54,3751.54) U1.V7@4747.28,3767.28 ; v1(4731.54,3846.02) U1.R7@4747.28,3861.77 ; v1(4731.54,3877.52) U1.P7@4747.28,3893.27 ; v1(4763.03,3846.02) U1.R8@4778.78,3861.77 ; v1(4763.03,3877.52) U1.P8@4778.78,3893.27 ; v1(4763.03,3940.51) U1.M8@4778.78,3956.26 ; v1(4763.03,3972.01) U1.L8@4778.78,3987.76 ; v1(4763.03,4035) U1.K8@4778.78,4019.25 ; v1(4763.03,4066.5) U1.J8@4778.78,4050.75 ; v1(4763.03,4097.99) U1.H8@4778.78,4082.24 ; v1(4763.03,4160.98) U1.F8@4778.78,4145.24 ; v1(4763.03,4192.48) U1.E8@4778.78,4176.73 ; v1(4794.53,3940.51) U1.M9@4810.28,3956.26 ; v1(4794.53,3972.01) U1.L9@4810.28,3987.76 ; v1(4794.53,4035) U1.K9@4810.28,4019.25 ; v1(4794.53,4066.5) U1.J9@4810.28,4050.75 ; v1(4794.53,4097.99) U1.H9@4810.28,4082.24 ; v1(4826.02,3940.51) U1.M10@4841.77,3956.26 ; v1(4826.02,3972.01) U1.L10@4841.77,3987.76 ; v1(4826.02,4035) U1.K10@4841.77,4019.25 ; v1(4826.02,4066.5) U1.J10@4841.77,4050.75 ; v1(4826.02,4097.99) U1.H10@4841.77,4082.24 ; v1(4826.02,4318.46) U1.A10@4841.77,4302.72 ; C28.2@4838.5,3358 4838.5,3325.5 v1(4839,3325) ; v1(4857.52,3940.51) U1.M11@4873.27,3956.26 ; v1(4857.52,3972.01) U1.L11@4873.27,3987.76 ; v1(4857.52,4035) U1.K11@4873.27,4019.25 ; v1(4857.52,4066.5) U1.J11@4873.27,4050.75 ; v1(4857.52,4097.99) U1.H11@4873.27,4082.24 ; U1.P11@4873.27,3893.27 v1(4889.02,3877.52) ; v1(4889.02,3940.51) U1.M12@4904.76,3956.26 ; v1(4889.02,3972.01) U1.L12@4904.76,3987.76 ; v1(4889.02,4035) U1.K12@4904.76,4019.25 ; v1(4889.02,4066.5) U1.J12@4904.76,4050.75 ; v1(4889.02,4097.99) U1.H12@4904.76,4082.24 ; U1.P12@4904.76,3893.27 v1(4920.51,3877.52) ; U1.F12@4904.76,4145.24 v1(4920.51,4160.98) ; U1.E12@4904.76,4176.73 v1(4920.51,4192.48) ; U1.R14@4967.76,3861.77 v1(4983.5,3846.02) ; U1.P14@4967.76,3893.27 v1(4983.5,3877.52) ; U1.M14@4967.76,3956.26 v1(4983.5,3940.51) ; U1.K14@4967.76,4019.25 v1(4983.5,4035) ; U1.H14@4967.76,4082.24 v1(4983.5,4097.99) ; U1.F14@4967.76,4145.24 v1(4983.5,4160.98) ; U1.E14@4967.76,4176.73 v1(4983.5,4192.48) ; U1.R15@4999.25,3861.77 v1(5015,3846.02) ; U1.P15@4999.25,3893.27 v1(5015,3877.52) ; U1.M15@4999.25,3956.26 v1(5015,3940.51) ; U1.K15@4999.25,4019.25 v1(5015,4035) ; U1.H15@4999.25,4082.24 v1(5015,4097.99) ; U1.F15@4999.25,4145.24 v1(5015,4160.98) ; U1.E15@4999.25,4176.73 v1(5015,4192.48) ; U1.G16@5030.75,4113.74 v1(5046.5,4129.49) ; U1.G17@5062.24,4113.74 v1(5077.99,4129.49) ; U1.L18@5093.74,3987.76 v1(5109.49,3972.01) ; U1.H18@5093.74,4082.24 v1(5109.49,4097.99) ; U1.W19@5125.24,3735.79 v1(5140.98,3720.04) ; U1.H19@5125.24,4082.24 v3(5140.98,4097.99) ; v1(5204,2384) 5204,2426.07 U23.7@5217.53,2439.6 5220.56,2442.63 C161.2@5220.56,2525 ; U23.2@5272.06,2439.6 5276.9,2434.76 v1(5299.79,2434.76) 5322.69,2434.76 C162.2@5329,2428.44 ; v1(5296,3321) 5296.5,3321.5 C29.2@5296.5,3359 ; C77.2@5443.54,4105.49 v1(5443.54,4136.87) ; v1(5496,2335) J4.2@5496,2388 ; R112.1@5529,4541.01 v1(5549,4541.01) R114.1@5569,4541.01 ; U7.2@5539.4,4166 5539.4,4134.01 v1(5539.54,4133.87) ; v1(5549,4585) R113.1@5549,4604.01 ; U6.2@5688.4,4165 5688.4,4135.01 v1(5688.54,4134.87) ; C76.2@5778.02,4000.87 v1(5778.02,4028.03) ; v1(5808,2445) U2.2@5840.87,2445 ; C78.2@6061.62,4732 6062.62,4731 6090,4731 v1(6091,4730) ; R86.2@6094,4794.38 6100.38,4788 v1(6134,4788) ; R82.2@6169.62,4991 6170.19,4991 6177,4997.81 v1@6177,5026 ; v1(6333,4002) 6333.84,4002.84 6376.3,4002.84 U26.4@6377.13,4003.68 ; v1@6335,4122 v1(6335.21,4121.79) U26.10@6377.13,4121.79 ; v1@6335,4220 6335.21,4220.21 U26.15@6377.13,4220.21 ; v1(6335,4340) 6335.84,4339.16 6376.3,4339.16 U26.21@6377.13,4338.32 ; v1(7090,5052) R123.2@7090,5079.76 ; v1(7125,5157) U18.2@7125,5187.87 ; v1(7160,5052) R124.2@7160,5079.76
  Top Layer w15: U1.A19@5125.24,4302.72 v1(5140.98,4318.46)
  Bottom Layer w6.25: v1(6345,2585) C39.1@6384.57,2585 ; v1(6388,2521) C38.1@6422.65,2521 ; C41.1@6539.65,2555 C40.1@6539.65,2595 6540,2595.35 v1(6540,2630) ; LED1.1@6580,2422.4 6684.41,2422.4 R54.1@6687.01,2425 ; R53.1@6755,2737.72 v1(6755,2785) ; 6787.74,5511 6788.74,5510 ; v1(6895,2315) C35.2@6895,2363.5
  Bottom Layer w10: v1(3161.54,4324.7) 3163.01,4326.16 3163.01,4344.6 3176.71,4358.3 C2.2@3177.69,4358.3 ; v1(3162.54,4193.7) 3163.01,4194.16 3163.01,4212.34 3176.71,4226.04 C3.2@3177.69,4226.04 ; v1(3163.54,3862.7) 3163.54,3881.67 3177.24,3895.38 C21.2@3177.69,3895.38 ; v1(3163.54,3928.7) 3163.54,3947.81 3177.24,3961.51 C8.2@3177.69,3961.51 ; v1(3163.54,3994.7) 3163.54,4013.94 3177.24,4027.64 C20.2@3177.69,4027.64 ; v1(3163.54,4060.7) 3163.54,4080.07 3177.24,4093.77 C4.2@3177.69,4093.77 ; v1(3163.54,4126.7) 3163.54,4146.2 3177.24,4159.9 C16.2@3177.69,4159.9 ; v1(3163.54,4259.7) 3163.54,4278.47 3177.24,4292.17 C15.2@3177.69,4292.17 ; v1(3163.54,4458.7) 3163.54,4476.86 3177.24,4490.56 C1.2@3177.69,4490.56 ; v1(3163.54,4523.7) 3163.54,4543 3177.24,4556.7 C13.2@3177.69,4556.7 ; v1(3164.54,3795.7) 3164.54,3816.09 C9.2@3177.69,3829.24 ; v1(3164.54,4391.7) 3164.54,4411.28 C14.2@3177.69,4424.43 ; C155.2@3836,5678.38 3836,5643 v1(3837,5642) ; U218.5@3840.5,5932 3841.5,5933 3878,5933 v1(3879,5934) ; C164.2@3930.46,2349 3945,2363.54 J10.2@3945,2435 ; v1(4358.31,4742.06) 4359.24,4743 C117.2@4388,4743 ; v1(4358.31,4793.06) 4358.37,4793 C116.2@4388,4793 ; v1(4358.31,4842.06) 4359.24,4843 C115.2@4388,4843 ; v1@4358.31,4893.06 v1(4358.37,4893) C114.2@4388,4893 ; v1@4422,5513 v1(4423,5514) 4424,5515 C122.2@4451.38,5515 ; v1(4423,5465) C123.2@4451.38,5465 ; C68.1@4471.07,3976.9 4470.86,3976.69 4470.86,3906.21 C67.1@4470.65,3906 C67.1@4473.77,3902.87 ; v1(4530,5268) C124.1@4555.76,5268 ; v1(4530,5318) C125.1@4555.76,5318 ; R128.2@4531.69,4960.56 v1(4556.44,4960.56) v1@4557,4960 ; C121.2@4584,4960.62 4584.62,4960 v1(4610,4960) 4634.38,4960 C120.2@4635,4960.62 ; C119.2@4688,4961.62 4688.62,4961 v1(4713,4961) 4736.62,4961 C118.2@4737,4960.62 ; v1(4700.04,4066.5) 4700.61,4065.93 4731.43,4065.93 C50.1@4732,4065.35 ; C52.1@4732,3943.35 4733.42,3941.93 4761.61,3941.93 v1(4763.03,3940.51) ; C127.1@4763,5267 v1(4789,5267) ; C128.1@4763,5317 v1(4790,5317) ; v1(4763.03,4160.98) 4763.34,4160.68 4763.34,4129.31 C45.1@4763.65,4129 ; v1(4794.53,3940.51) 4794.53,3914.63 4800.16,3909 C51.1@4800.35,3909 ; C163.2@4798.46,2345 4815,2361.54 J9.2@4815,2435 ; C129.2@4867.24,5460 v1(4895,5460) v1@4896,5461 ; C130.2@4867.24,5510 4894,5510 v1(4894.5,5510.5) v1@4895,5511 ; C49.1@4873.35,3909 4874.14,3909 4879.77,3903.37 4879.77,3888.93 4889.02,3879.68 v1(4889.02,3877.52) ; C48.1@4915.65,3909 4917.15,3907.5 4918.98,3905.67 4918.98,3879.05 v1(4920.51,3877.52) ; C44.1@4916,4129 4918.98,4131.98 4918.98,4159.45 v1(4920.51,4160.98) ; C47.1@4950,4028.65 4950,4029.37 4955.63,4035 v1(4983.5,4035) ; C46.1@4951,4091.29 4951,4092.08 4956.63,4097.71 4957.42,4097.71 4957.7,4097.99 v1(4983.5,4097.99) ; C131.1@4969.09,5340 v1(5011,5340) ; R161.2@5164,2376.47 5171.53,2384 v1(5204,2384) ; v1(5220,4747) 5221.53,4748.53 5248.29,4748.53 C103.2@5251.76,4752 ; v1(5224,4802) C102.2@5251.76,4802 ; v1(5224,4852) C101.2@5251.76,4852 ; v1(5224,4902) C100.2@5251.76,4902 ; v1(5305,5460) C105.2@5332.76,5460 ; v1(5305,5510) C104.2@5331.38,5510 ; v1(5410,5260) C107.1@5436.38,5260 ; v1(5410,5305) C106.1@5436.38,5305 ; R104.2@5415,4958.62 5415.62,4958 v1(5438,4958) ; C99.2@5465,4958.62 5466.38,4960 v1(5492,4960) 5513.62,4960 C98.2@5515,4958.62 ; C97.2@5570,4958.62 5570.62,4958 v1(5595,4958) 5619.38,4958 C96.2@5620,4958.62 ; C109.1@5648.62,5260 v1(5675,5260) ; C110.1@5648.62,5305 v1(5675,5305) ; C111.2@5753.62,5460 v1(5780,5460) ; C112.2@5753.62,5510 v1(5780,5510) ; v1(5808,2445) C73.2@5871.38,2445 ; C113.1@5852.09,5340 v1(5890,5340) ; v1(6134,4788) U5.4@6183.14,4787.99 ; v1@6175,5021.38 6175,4993.34 Y1.2@6181.42,4986.92 ; R89.2@6450,4963.62 6450.38,4964 v1(6475,4964) ; C82.2@6506.06,4963.31 6506.76,4964 v1(6528,4964) 6549.62,4964 C80.2@6550,4963.62 ; C79.2@6610,4963.62 6610.62,4963 v1(6633,4963) 6655.76,4963 C81.2@6656.06,4963.31 ; v1(7125,5157) C126.2@7125,5218.38
  Bottom Layer w12: v1(6335,5445) C88.2@6371.38,5445 ; v1(6335,5500) C87.2@6371.38,5500 ; v1(6445,5255) C90.1@6471.38,5255 ; v1(6445,5300) C89.1@6471.38,5300 ; C91.1@6683.62,5255 v1(6710,5255) ; C92.1@6683.62,5300 v1(6710,5300) ; C93.2@6788.62,5445 v1(6825,5445) ; C94.2@6788.74,5495 v1(6825,5495) ; C95.1@6887.09,5320 v1(6935,5320)
  Bottom Layer w15: v1(3546,4412) 3546,4460 ; v1(3646,4412) 3646,4460 ; v1(3746,4413) 3746,4460 ; 3946,4460 v1(3946,4408) 3946.57,4407.43 3958.77,4407.43 3976.57,4389.63 R175.1@3976.57,4379
  other v1: 6335.11,4220.11 6178,5027
  other v2: 4617.76,4705.76 6540,4707.75 5501.06,4713.82 4570.51,4753 4617.76,4753 4665,4753 6492.76,4755 6540,4755 6587.25,4755 5453.82,4761.06 5501.06,4761.06 5548.31,4761.06 4617.76,4800.24 6540,4802.24 5501.06,4808.31
HSEC_5V0: D1.2 J1.48 J1.86 J1.100 J2.14 J2.60 J2.82 TP1.1
HSEC_ADC-VREFHI: J1.45 R41.1
IN_5V0: C38.2 C39.2 C166.1 C167.1 C168.1 C169.1 C174.1 C175.1 C176.1 C177.1 C182.1 C183.1 D1.1 R45.2 R46.2 R51.2 U8.3 U24.7 U24.18 U25.7 U25.18 U26.7 U26.18 U27.7 U27.18 U28.7 U28.18 | length 489
  Top Layer w6.25: R46.2@6520.47,2550 6532.28,2561.81 R45.2@6532.28,2595
  Top Layer w10: U24.7@3505.87,3737.27 3547.27,3737.27 v1@3548,3738 ; v1(6333,4061) 6333.87,4061.87 6376.27,4061.87 U26.7@6377.13,4062.73 ; v1(6335,4279) 6335.13,4279.13 6377,4279.13 U26.18@6377.13,4279.27
  Bottom Layer w10: C175.1@6266,4278.61 6266.39,4279 v1(6335,4279) ; C174.1@6268,4061.39 6268.39,4061 v1(6333,4061) ; D1.1@6442.36,2415 6455.04,2427.68 C39.2@6455.04,2585
  other v1: 3547.63,3737.63
MCU_GPIO0: U1.C8 U24.47 | length 22.3
  Top Layer w6.25: v1(4763.03,4255.47) U1.C8@4778.78,4239.72
MCU_GPIO1: U1.D8 U24.46 | length 22.3
  Top Layer w6.25: v1(4763.03,4223.98) U1.D8@4778.78,4208.23
MCU_GPIO2: U1.A7 U24.44 | length 22.3
  Top Layer w6.25: v1(4731.54,4318.46) U1.A7@4747.28,4302.72
MCU_GPIO3: U1.B7 U24.43 | length 22.3
  Top Layer w6.25: v1(4731.54,4286.97) U1.B7@4747.28,4271.22
MCU_GPIO4: U1.C7 U24.41 | length 22.3
  Top Layer w6.25: v1(4731.54,4255.47) U1.C7@4747.28,4239.72
MCU_GPIO5: U1.D7 U24.40 | length 22.3
  Top Layer w6.25: v1(4731.54,4223.98) U1.D7@4747.28,4208.23
MCU_GPIO6: U1.A6 U24.38 | length 22.3
  Top Layer w6.25: v1(4700.04,4318.46) U1.A6@4715.79,4302.72
MCU_GPIO7: U1.B6 U24.37 | length 22.3
  Top Layer w6.25: v1(4700.04,4286.97) U1.B6@4715.79,4271.22
MCU_GPIO8: U1.G2 U24.36 | length 22.3
  Top Layer w6.25: v1(4574.06,4129.49) U1.G2@4589.8,4113.74
MCU_GPIO9: U1.G3 U24.35 | length 22.3
  Top Layer w6.25: v1(4605.55,4129.49) U1.G3@4621.3,4113.74
MCU_GPIO10: U1.B2 U24.33 | length 22.3
  Top Layer w6.25: v1(4574.06,4286.97) U1.B2@4589.8,4271.22
MCU_GPIO11: U1.C1 U24.32 | length 22.3
  Top Layer w6.25: v1(4542.56,4255.47) U1.C1@4558.31,4239.72
MCU_GPIO12: U1.C2 U24.30 | length 22.3
  Top Layer w6.25: v1(4574.06,4255.47) U1.C2@4589.8,4239.72
MCU_GPIO13: U1.D1 U24.29 | length 26.1
  Top Layer w6.25: v1@4539.82,4226.71 v1(4542.56,4223.98) U1.D1@4558.31,4208.23
MCU_GPIO14: R163.1 U1.D2 U24.27 | length 22.3
  Top Layer w6.25: v1(4574.06,4223.98) U1.D2@4589.8,4208.23
MCU_GPIO15: R164.1 U1.D3 U24.26 | length 22.3
  Top Layer w6.25: v1(4605.55,4223.98) U1.D3@4621.3,4208.23
MCU_GPIO16: U1.E1 U27.47 | length 22.3
  Top Layer w6.25: v1(4542.56,4192.48) U1.E1@4558.31,4176.73
MCU_GPIO17: U1.E2 U27.46 | length 22.3
  Top Layer w6.25: v1(4574.06,4192.48) U1.E2@4589.8,4176.73
MCU_GPIO18: U1.E3 U27.44 | length 22.3
  Top Layer w6.25: v1(4605.55,4192.48) U1.E3@4621.3,4176.73
MCU_GPIO19: U1.E4 U27.43 | length 22.3
  Top Layer w6.25: v1(4637.05,4192.48) U1.E4@4652.8,4176.73
MCU_GPIO20: U1.F2 U27.41 | length 22.3
  Top Layer w6.25: v1(4574.06,4160.98) U1.F2@4589.8,4145.24
MCU_GPIO21: U1.F3 U27.40 | length 22.3
  Top Layer w6.25: v1(4605.55,4160.98) U1.F3@4621.3,4145.24
MCU_GPIO22: U1.J4 U27.38 | length 22.3
  Top Layer w6.25: v1(4637.05,4066.5) U1.J4@4652.8,4050.75
MCU_GPIO23: U1.K4 U27.37 | length 22.3
  Top Layer w6.25: v1(4637.05,4035) U1.K4@4652.8,4019.25
MCU_GPIO24: U1.K3 U27.36 | length 22.3
  Top Layer w6.25: v1(4605.55,4035) U1.K3@4621.3,4019.25
MCU_GPIO25: U1.K2 U27.35 | length 22.3
  Top Layer w6.25: v1(4574.06,4035) U1.K2@4589.8,4019.25
MCU_GPIO26: U1.K1 U27.33 | length 22.3
  Top Layer w6.25: v1(4542.56,4035) U1.K1@4558.31,4019.25
MCU_GPIO27: U1.L1 U27.32 | length 22.3
  Top Layer w6.25: v1(4542.56,3972.01) U1.L1@4558.31,3987.76
MCU_GPIO28: R165.1 S5.3 U1.V11 U27.30 | length 22.3
  Top Layer w6.25: U1.V11@4873.27,3767.28 v1(4889.02,3751.54)
MCU_GPIO29: R166.1 U1.W11 U19.3 U27.29 | length 22.3
  Top Layer w6.25: U1.W11@4873.27,3735.79 v1(4889.02,3720.04)
MCU_GPIO30: U1.T11 U27.27 | length 22.3
  Top Layer w6.25: U1.T11@4873.27,3830.28 v1(4889.02,3814.53)
MCU_GPIO31: R69.1 U1.U11 U2.1 U27.26 | length 94.8
  Top Layer w6.25: U1.U11@4873.27,3798.78 v1(4889.02,3783.03) ; R69.1@5768.62,2483 5769.22,2482.4 U2.1@5840.87,2482.4
MCU_GPIO32: J1.87 U1.U13 | length 22.3
  Top Layer w6.25: U1.U13@4936.26,3798.78 v1(4952.01,3783.03)
MCU_GPIO33: J1.89 U1.T13 | length 22.3
  Top Layer w6.25: U1.T13@4936.26,3830.28 v1(4952.01,3814.53)
MCU_GPIO34: J1.88 R70.1 U1.U14 U2.3 | length 95.7
  Top Layer w6.25: U1.U14@4967.76,3798.78 v1(4983.5,3783.03) ; R70.1@5767.62,2408 5768.02,2407.6 U2.3@5840.87,2407.6
MCU_GPIO35: U1.T14 U25.47 | length 22.3
  Top Layer w6.25: U1.T14@4967.76,3830.28 v1(4983.5,3814.53)
MCU_GPIO36: U1.V16 U25.46 | length 22.3
  Top Layer w6.25: U1.V16@5030.75,3767.28 v1(5046.5,3751.54)
MCU_GPIO37: U1.U16 U25.44 | length 22.3
  Top Layer w6.25: U1.U16@5030.75,3798.78 v1(5046.5,3783.03)
MCU_GPIO38: U1.T16 U25.43 | length 22.3
  Top Layer w6.25: U1.T16@5030.75,3830.28 v1(5046.5,3814.53)
MCU_GPIO39: J1.90 U1.W17 | length 22.3
  Top Layer w6.25: U1.W17@5062.24,3735.79 v1(5077.99,3720.04)
MCU_GPIO40: J1.91 U1.V17 | length 22.3
  Top Layer w6.25: U1.V17@5062.24,3767.28 v1(5077.99,3751.54)
MCU_GPIO41: J1.93 U1.U17 | length 22.3
  Top Layer w6.25: U1.U17@5062.24,3798.78 v1(5077.99,3783.03)
MCU_GPIO42: J2.85 U1.D19 U24.48 | length 22.3
  Top Layer w6.25: U1.D19@5125.24,4208.23 v1(5140.98,4223.98)
MCU_GPIO43: J2.87 U1.C19 U27.48 | length 22.3
  Top Layer w6.25: U1.C19@5125.24,4239.72 v1(5140.98,4255.47)
MCU_GPIO44: U1.K18 U9.2 | length 22.3
  Top Layer w6.25: U1.K18@5093.74,4019.25 v1(5109.49,4035)
MCU_GPIO45: J1.94 U1.K19 | length 22.3
  Top Layer w6.25: U1.K19@5125.24,4019.25 v1(5140.98,4035)
MCU_GPIO46: J2.89 U1.E19 U25.48 | length 22.3
  Top Layer w6.25: U1.E19@5125.24,4176.73 v1(5140.98,4192.48)
MCU_GPIO47: J2.91 U1.E18 U28.48 | length 22.3
  Top Layer w6.25: U1.E18@5093.74,4176.73 v1(5109.49,4192.48)
MCU_GPIO48: J2.1 U1.R16 | length 22.3
  Top Layer w6.25: U1.R16@5030.75,3861.77 v1(5046.5,3846.02)
MCU_GPIO49: J2.3 U1.R17 | length 22.3
  Top Layer w6.25: U1.R17@5062.24,3861.77 v1(5077.99,3846.02)
MCU_GPIO50: J2.5 U1.R18 | length 22.3
  Top Layer w6.25: U1.R18@5093.74,3861.77 v1(5109.49,3846.02)
MCU_GPIO51: J2.7 U1.R19 | length 22.3
  Top Layer w6.25: U1.R19@5125.24,3861.77 v1(5140.98,3846.02)
MCU_GPIO52: J2.9 U1.P16 | length 22.3
  Top Layer w6.25: U1.P16@5030.75,3893.27 v1(5046.5,3877.52)
MCU_GPIO53: J2.11 U1.P17 | length 22.3
  Top Layer w6.25: U1.P17@5062.24,3893.27 v1(5077.99,3877.52)
MCU_GPIO54: J2.2 U1.P18 | length 22.3
  Top Layer w6.25: U1.P18@5093.74,3893.27 v1(5109.49,3877.52)
MCU_GPIO55: J2.4 U1.P19 | length 22.3
  Top Layer w6.25: U1.P19@5125.24,3893.27 v1(5140.98,3877.52)
MCU_GPIO56: J2.6 U1.N16 | length 22.3
  Top Layer w6.25: U1.N16@5030.75,3924.76 v1(5046.5,3909.02)
MCU_GPIO57: J2.8 U1.N18 | length 22.3
  Top Layer w6.25: U1.N18@5093.74,3924.76 v1(5109.49,3909.02)
MCU_GPIO58: J2.10 U1.N17 | length 22.3
  Top Layer w6.25: U1.N17@5062.24,3924.76 v1(5077.99,3909.02)
MCU_GPIO59: J2.12 R3.1
MCU_GPIO60: U1.M17 U25.41 | length 22.3
  Top Layer w6.25: U1.M17@5062.24,3956.26 v1(5077.99,3940.51)
MCU_GPIO61: R4.1 U25.40
MCU_GPIO62: U1.J17 U25.38 | length 22.3
  Top Layer w6.25: U1.J17@5062.24,4050.75 v1(5077.99,4066.5)
MCU_GPIO63: U1.J16 U25.37 | length 22.3
  Top Layer w6.25: U1.J16@5030.75,4050.75 v1(5046.5,4066.5)
MCU_GPIO64: R5.1 U25.36
MCU_GPIO65: U1.K16 U25.35 | length 22.3
  Top Layer w6.25: U1.K16@5030.75,4019.25 v1(5046.5,4035)
MCU_GPIO66: R6.1 U25.33
MCU_GPIO67: U1.B19 U25.32 | length 22.3
  Top Layer w6.25: U1.B19@5125.24,4271.22 v1(5140.98,4286.97)
MCU_GPIO68: U1.C18 U25.30 | length 22.3
  Top Layer w6.25: U1.C18@5093.74,4239.72 v1(5109.49,4255.47)
MCU_GPIO69: U1.B18 U25.29 | length 22.3
  Top Layer w6.25: U1.B18@5093.74,4271.22 v1(5109.49,4286.97)
MCU_GPIO70: R7.1 U25.27
MCU_GPIO71: U1.B17 U25.26 | length 22.3
  Top Layer w6.25: U1.B17@5062.24,4271.22 v1(5077.99,4286.97)
MCU_GPIO72: R8.1 R74.2 R167.1 S4.2 U28.47 | length 324.1
  Top Layer w6.25: v1(4527,2775) 4527,2801 4641,2915 R74.2@4749.38,2915
  Bottom Layer w6.25: R167.1@4527,2746.53 v1(4527,2775)
MCU_GPIO73: U1.A16 U28.46 | length 22.3
  Top Layer w6.25: U1.A16@5030.75,4302.72 v1(5046.5,4318.46)
MCU_GPIO74: U1.C17 U28.44 | length 22.3
  Top Layer w6.25: U1.C17@5062.24,4239.72 v1(5077.99,4255.47)
MCU_GPIO75: U1.D16 U9.4 | length 22.3
  Top Layer w6.25: U1.D16@5030.75,4208.23 v1(5046.5,4223.98)
MCU_GPIO76: U1.C16 U28.41 | length 22.3
  Top Layer w6.25: U1.C16@5030.75,4239.72 v1(5046.5,4255.47)
MCU_GPIO77: U1.A15 U28.40 | length 22.3
  Top Layer w6.25: U1.A15@4999.25,4302.72 v1(5015,4318.46)
MCU_GPIO78: U1.B15 U28.38 | length 22.3
  Top Layer w6.25: U1.B15@4999.25,4271.22 v1(5015,4286.97)
MCU_GPIO79: U1.C15 U28.37 | length 22.3
  Top Layer w6.25: U1.C15@4999.25,4239.72 v1(5015,4255.47)
MCU_GPIO80: U1.D15 U28.36 | length 22.3
  Top Layer w6.25: U1.D15@4999.25,4208.23 v1(5015,4223.98)
MCU_GPIO81: U1.A14 U28.35 | length 22.3
  Top Layer w6.25: U1.A14@4967.76,4302.72 v1(4983.5,4318.46)
MCU_GPIO82: U1.B14 U28.33 | length 22.3
  Top Layer w6.25: U1.B14@4967.76,4271.22 v1(4983.5,4286.97)
MCU_GPIO83: U1.C14 U28.32 | length 22.3
  Top Layer w6.25: U1.C14@4967.76,4239.72 v1(4983.5,4255.47)
MCU_GPIO84: R75.1 R168.1 S4.1 U1.A11 U28.30 | length 193.3
  Top Layer w6.25: S4.1@4675,2865 4747.38,2865 R75.1@4749.38,2867 ; U1.A11@4873.27,4302.72 v1(4889.02,4318.46)
  Bottom Layer w6.25: v1(4889.02,4318.46) 4937.02,4366.47 R168.1@4965,4366.47
MCU_GPIO85: R169.1 U1.B11 U28.29 | length 133.1
  Top Layer w6.25: U1.B11@4873.27,4271.22 v1(4889.02,4286.97)
  Bottom Layer w6.25: R169.1@4888,4368.47 4874.06,4368.47 4872.44,4366.85 4872.44,4365.66 4863,4356.22 4863,4314.7 4889.02,4288.68 v1(4889.02,4286.97)
MCU_GPIO86: U1.C11 U28.27 | length 22.3
  Top Layer w6.25: U1.C11@4873.27,4239.72 v1(4889.02,4255.47)
MCU_GPIO87: U1.D11 U28.26 | length 22.3
  Top Layer w6.25: U1.D11@4873.27,4208.23 v1(4889.02,4223.98)
MCU_GPIO88: U1.C6 U26.47 | length 22.3
  Top Layer w6.25: v1(4700.04,4255.47) U1.C6@4715.79,4239.72
MCU_GPIO89: U1.D6 U26.46 | length 22.3
  Top Layer w6.25: v1(4700.04,4223.98) U1.D6@4715.79,4208.23
MCU_GPIO90: U1.A5 U26.44 | length 22.3
  Top Layer w6.25: v1(4668.54,4318.46) U1.A5@4684.29,4302.72
MCU_GPIO91: U1.B5 U26.43 | length 22.3
  Top Layer w6.25: v1(4668.54,4286.97) U1.B5@4684.29,4271.22
MCU_GPIO92: U1.A4 U26.41 | length 22.3
  Top Layer w6.25: v1(4637.05,4318.46) U1.A4@4652.8,4302.72
MCU_GPIO93: U1.B4 U26.40 | length 22.3
  Top Layer w6.25: v1(4637.05,4286.97) U1.B4@4652.8,4271.22
MCU_GPIO94: U1.A3 U26.38 | length 22.3
  Top Layer w6.25: v1(4605.55,4318.46) U1.A3@4621.3,4302.72
MCU_GPIO95: U1.B3 U26.32 | length 22.3
  Top Layer w6.25: v1(4605.55,4286.97) U1.B3@4621.3,4271.22
MCU_GPIO96: J1.95 U1.C3 | length 22.3
  Top Layer w6.25: v1(4605.55,4255.47) U1.C3@4621.3,4239.72
MCU_GPIO97: J1.96 U1.A2 | length 22.3
  Top Layer w6.25: v1(4574.06,4318.46) U1.A2@4589.8,4302.72
MCU_GPIO98: J1.97 U1.F1 | length 22.3
  Top Layer w6.25: v1(4542.56,4160.98) U1.F1@4558.31,4145.24
MCU_GPIO99: J1.98 U1.G1 | length 24.8
  Top Layer w6.25: v1@4540.77,4131.28 v1(4542.56,4129.49) U1.G1@4558.31,4113.74
MCU_GPIO100: J2.93 U1.H1 U26.48 | length 22.3
  Top Layer w6.25: v1(4542.56,4097.99) U1.H1@4558.31,4082.24
MCU_GPIO101: U1.H2 U26.30 | length 22.3
  Top Layer w6.25: v1(4574.06,4097.99) U1.H2@4589.8,4082.24
MCU_GPIO102: U1.H3 U26.29 | length 22.3
  Top Layer w6.25: v1(4605.55,4097.99) U1.H3@4621.3,4082.24
MCU_GPIO103: U1.J1 U26.27 | length 22.3
  Top Layer w6.25: v1(4542.56,4066.5) U1.J1@4558.31,4050.75
MCU_GPIO104: U1.J2 U26.26 | length 22.3
  Top Layer w6.25: v1(4574.06,4066.5) U1.J2@4589.8,4050.75
MCU_GPIO105: U1.J3 U9.20 | length 22.3
  Top Layer w6.25: v1(4605.55,4066.5) U1.J3@4621.3,4050.75
MCU_GPIO106: R92.2 U1.L2 U9.19 | length 22.3
  Top Layer w6.25: v1(4574.06,3972.01) U1.L2@4589.8,3987.76
MCU_GPIO107: J2.86 R72.2 U1.L3 | length 57.9
  Top Layer w6.25: v1(4605.55,3972.01) U1.L3@4621.3,3987.76
  Bottom Layer w6.25: v1(4605.55,3972.01) 4607.27,3972.01 4631.26,3996
MCU_GPIO108: R93.1 U1.L4 U9.8 | length 86
  Top Layer w6.25: v1(4637.05,3972.01) U1.L4@4652.8,3987.76 ; U9.8@6634.49,4823.9 v1(6665.27,4823.9)
  Bottom Layer w4: R93.1@6632.75,4825 R93.1@6633.86,4823.9
  Bottom Layer w6.25: R93.1@6633.86,4823.9 v1(6665.27,4823.9)
MCU_GPIO109: U1.N2 U9.27 | length 22.3
  Top Layer w6.25: v1(4574.06,3909.02) U1.N2@4589.8,3924.76
MCU_GPIO110: U1.M2 U9.29 | length 22.3
  Top Layer w6.25: v1(4574.06,3940.51) U1.M2@4589.8,3956.26
MCU_GPIO111: U1.M4 U9.25 | length 22.3
  Top Layer w6.25: v1(4637.05,3940.51) U1.M4@4652.8,3956.26
MCU_GPIO112: U1.M3 U9.26 | length 22.3
  Top Layer w6.25: v1(4605.55,3940.51) U1.M3@4621.3,3956.26
MCU_GPIO113: U1.N4 U9.28 | length 22.3
  Top Layer w6.25: v1(4637.05,3909.02) U1.N4@4652.8,3924.76
MCU_GPIO114: U1.N3 U9.30 | length 22.3
  Top Layer w6.25: v1(4605.55,3909.02) U1.N3@4621.3,3924.76
MCU_GPIO115: U1.V12 U9.31 | length 22.3
  Top Layer w6.25: U1.V12@4904.76,3767.28 v1(4920.51,3751.54)
MCU_GPIO116: U1.W10 U9.32 | length 22.3
  Top Layer w6.25: v1(4826.02,3720.04) U1.W10@4841.77,3735.79
MCU_GPIO117: U1.U12 U9.1 | length 22.3
  Top Layer w6.25: U1.U12@4904.76,3798.78 v1(4920.51,3783.03)
MCU_GPIO118: U1.T12 U9.3 | length 22.3
  Top Layer w6.25: U1.T12@4904.76,3830.28 v1(4920.51,3814.53)
MCU_GPIO119: U1.T15 U9.18 | length 22.3
  Top Layer w6.25: U1.T15@4999.25,3830.28 v1(5015,3814.53)
MCU_GPIO120: J2.88 U1.U15 | length 22.3
  Top Layer w6.25: U1.U15@4999.25,3798.78 v1(5015,3783.03)
MCU_GPIO121: J2.90 U1.W16 | length 22.3
  Top Layer w6.25: U1.W16@5030.75,3735.79 v1(5046.5,3720.04)
MCU_GPIO122: U1.T8 U9.5 | length 22.3
  Top Layer w6.25: v1(4763.03,3814.53) U1.T8@4778.78,3830.28
MCU_GPIO123: U1.U8 U9.6 | length 22.3
  Top Layer w6.25: v1(4763.03,3783.03) U1.U8@4778.78,3798.78
MCU_GPIO124: U1.V8 U9.7 | length 22.3
  Top Layer w6.25: v1(4763.03,3751.54) U1.V8@4778.78,3767.28
MCU_GPIO125: J1.92 U1.T9 | length 22.3
  Top Layer w6.25: v1(4794.53,3814.53) U1.T9@4810.28,3830.28
MCU_GPIO126: U1.U9 U28.43 | length 22.3
  Top Layer w6.25: v1(4794.53,3783.03) U1.U9@4810.28,3798.78
MCU_GPIO127: U1.V9 U26.36 | length 22.3
  Top Layer w6.25: v1(4794.53,3751.54) U1.V9@4810.28,3767.28
MCU_GPIO128: U1.W9 U26.35 | length 22.3
  Top Layer w6.25: v1(4794.53,3720.04) U1.W9@4810.28,3735.79
MCU_GPIO129: U1.T10 U11.3 | length 22.3
  Top Layer w6.25: v1(4826.02,3814.53) U1.T10@4841.77,3830.28
MCU_GPIO130: U1.U10 U11.2 | length 22.3
  Top Layer w6.25: v1(4826.02,3783.03) U1.U10@4841.77,3798.78
MCU_GPIO131: U1.V10 U11.4 | length 22.3
  Top Layer w6.25: v1(4826.02,3751.54) U1.V10@4841.77,3767.28
MCU_GPIO132: U1.W18 U11.5 | length 22.3
  Top Layer w6.25: U1.W18@5093.74,3735.79 v1(5109.49,3720.04)
MCU_GPIO133: U1.G18 U26.37 | length 22.3
  Top Layer w6.25: U1.G18@5093.74,4113.74 v1(5109.49,4129.49)
MCU_GPIO134: U1.V18 U11.6 | length 22.3
  Top Layer w6.25: U1.V18@5093.74,3767.28 v1(5109.49,3751.54)
MCU_GPIO135: U1.U18 U11.7 | length 22.3
  Top Layer w6.25: U1.U18@5093.74,3798.78 v1(5109.49,3783.03)
MCU_GPIO136: R135.2 U1.T17 U11.26 | length 52.7
  Top Layer w6.25: R135.2@4568,4630.99 U11.26@4568,4661 ; U11.26@4568.27,4658.24 U11.26@4568.54,4658.51 ; U1.T17@5062.24,3830.28 v1(5077.99,3814.53)
MCU_GPIO137: U1.T18 U11.25 | length 22.3
  Top Layer w6.25: U1.T18@5093.74,3830.28 v1(5109.49,3814.53)
MCU_GPIO138: R127.1 U1.T19 U11.28 | length 48.9
  Top Layer w6.25: R127.1@4604,4630.99 R127.1@4604.46,4631.45 ; R127.1@4607.46,4633.46 4607.46,4658.06 U11.28@4607.91,4658.51 ; R127.1@4608,4630.99 R127.1@4608.5,4631.49 ; U1.T19@5125.24,3830.28 v1(5140.98,3814.53)
MCU_GPIO139: R136.2 U1.N19 U11.30 | length 44.3
  Top Layer w6.25: R136.2@4644,4623 R136.2@4644.14,4623.14 ; R136.2@4646.35,4628.65 R136.2@4647,4627.99 ; 4647.14,4637.65 4647.14,4658.37 U11.30@4647.28,4658.51 ; U1.N19@5125.24,3924.76 v1(5140.98,3909.02)
MCU_GPIO140: R137.2 U1.M19 U11.31 | length 105.7
  Top Layer w6.25: U11.31@4666.97,4658.51 4667.48,4658 R137.2@4667.48,4575.98 ; R137.2@4667.48,4576.5 R137.2@4668,4575.98 ; U1.M19@5125.24,3956.26 v1(5140.98,3940.51)
MCU_GPIO141: R138.2 U1.M18 U11.32 | length 43.5
  Top Layer w6.25: R138.2@4683,4622 R138.2@4683.33,4622.33 ; R138.2@4685.85,4627.15 R138.2@4686,4626.99 ; 4686.33,4638.15 4686.33,4658.19 U11.32@4686.65,4658.51 ; U1.M18@5093.74,3956.26 v1(5109.49,3940.51)
MCU_GPIO142: R139.2 U1.L19 U11.1 | length 86.1
  Top Layer w6.25: U11.1@4712.24,4684.1 4717.2,4684.1 4719,4682.31 R139.2@4719,4625.99 ; U1.L19@5125.24,3987.76 v1(5140.98,3972.01)
MCU_GPIO143: J6.11 U1.F18 | length 22.3
  Top Layer w6.25: U1.F18@5093.74,4145.24 v1(5109.49,4160.98)
MCU_GPIO144: J7.11 U1.F17 | length 22.3
  Top Layer w6.25: U1.F17@5062.24,4145.24 v1(5077.99,4160.98)
MCU_GPIO145: R123.1 U1.E17 U18.1 | length 84.1
  Top Layer w6.25: U1.E17@5062.24,4176.73 v1(5077.99,4192.48) ; U18.1@7087.6,5187.87 7087.6,5129.4 R123.1@7090,5127
MCU_GPIO146: R124.1 U1.D18 U18.3 | length 84.1
  Top Layer w6.25: U1.D18@5093.74,4208.23 v1(5109.49,4223.98) ; R124.1@7160,5127 7162.4,5129.4 U18.3@7162.4,5187.87
MCU_GPIO147: U1.D17 U26.33 | length 22.3
  Top Layer w6.25: U1.D17@5062.24,4208.23 v1(5077.99,4223.98)
MCU_GPIO148: J6.2 R117.1 U1.D14 U10.17 | length 554.7
  Top Layer w6.25: U1.D14@4967.76,4208.23 v1(4983.5,4223.98) ; v1(5380,5245) 5380.53,5244.47 5380.53,5146.44 J6.2@5391.97,5135 5391.97,4873.78 5406.57,4859.17 U10.17@5406.57,4829.96
  Bottom Layer w6.25: v1(5380,5245) R117.1@5380,5351.38
MCU_GPIO149: J7.2 R140.1 U1.A13 U11.17 | length 566.9
  Top Layer w6.25: v1(4501,5249) 4501,5149 J7.2@4510,5140 4510,4862.54 4523.27,4849.27 U11.17@4523.27,4821.9 ; U1.A13@4936.26,4302.72 v1(4952.01,4318.46)
  Bottom Layer w6.25: R140.1@4494,5354.38 4501,5347.38 v1(4501,5249)
MCU_GPIO150: R100.1 U1.B13 U12.5 | length 22.3
  Top Layer w6.25: U1.B13@4936.26,4271.22 v1(4952.01,4286.97)